# Altium PCB ble_lock_V1.2-20201223.PcbDoc
Units mm, origin at the board's own origin, x right, y up, seen from the top; angles counter-clockwise.
Board outline 45 x 20 mm, 2 copper layers (Top Layer, Bottom Layer); 60 components, 46 nets, 179 pads, 123 vias.
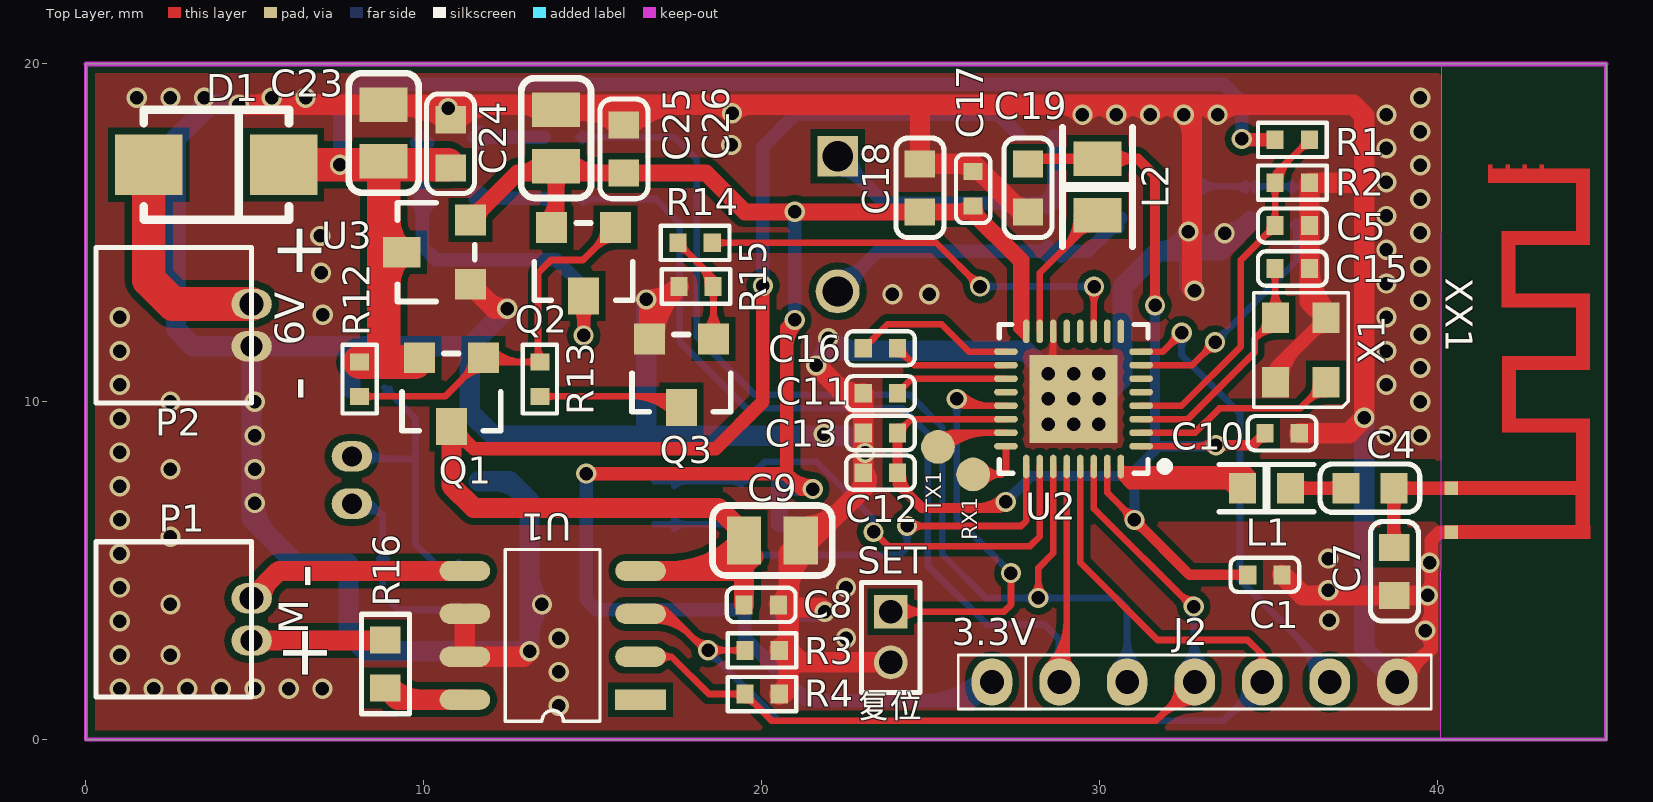
[diagram p0: Top Layer view]
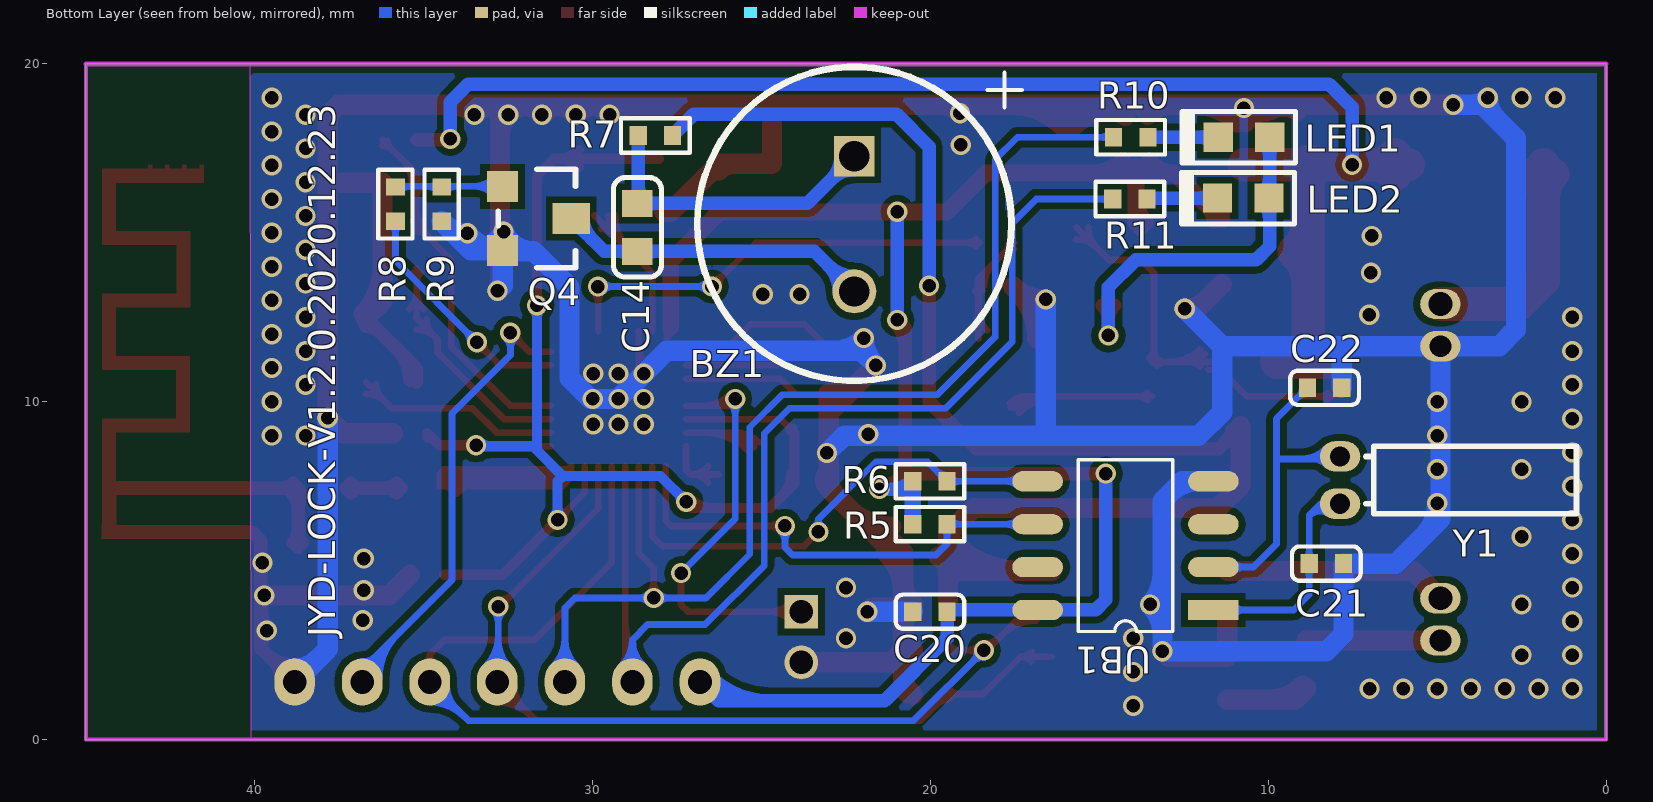
[diagram p1: Bottom Layer view, seen from below]
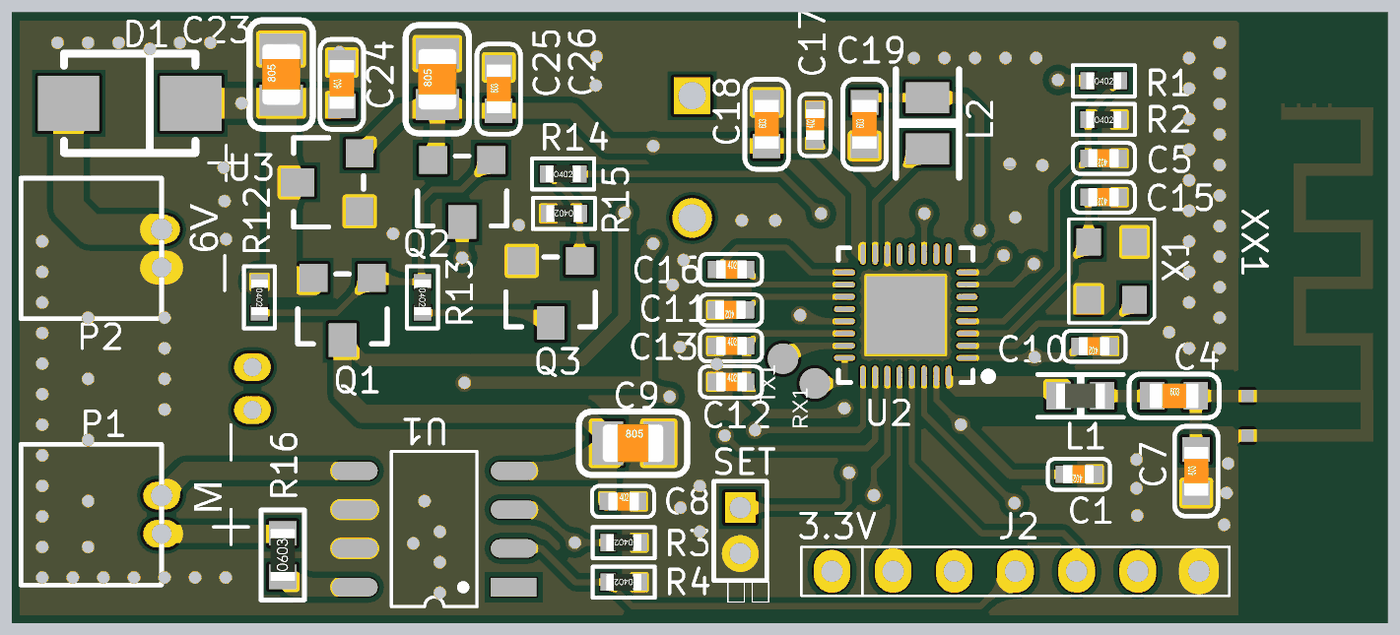
[diagram p2: 3D render of the assembled board from above, using the file's embedded part models]
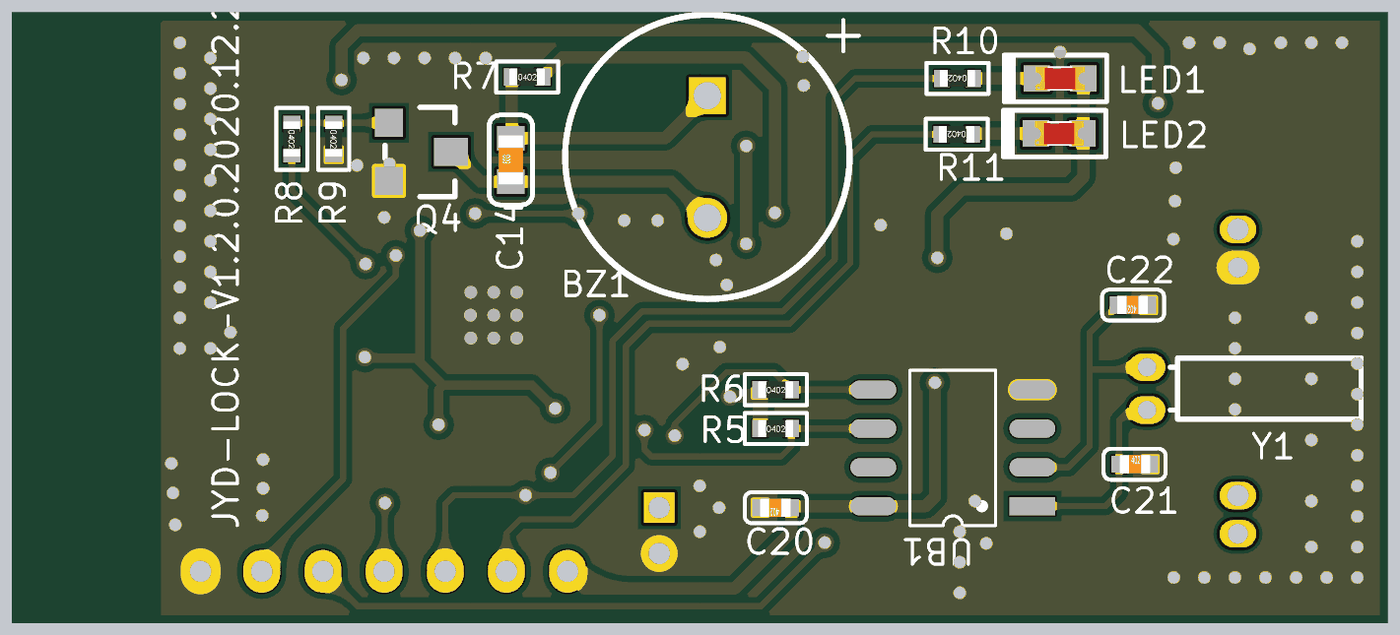
[diagram p3: 3D render of the assembled board from below, using the file's embedded part models]

## Layer stack, top to bottom
Top Layer: signal copper 0.0356
Dielectric: dielectric 0.32, FR-4, Dk 4.8
Bottom Layer: signal copper 0.0356

## Board outline
0,0 0,20 45,20 45,0

## Design rules (kind name [scope] priority, off if disabled: settings)
Clearance [All] p1 off: gap=0.5
Clearance Clearance_1 [All] p2: gap=0.2
ComponentClearance [All] p1: gap=0 collisioncheckmode=3 verticalgap=0 showdistances=FALSE
HoleToHoleClearance [All] p1: gap=0 allowstackedmicrovias=TRUE
MinimumSolderMaskSliver [All] p1: minsoldermaskwidth=0
PolygonConnect PolygonConnect_1 [IsVia] p1: connectstyle=Direct reliefconductorwidth=0.254 reliefentries=4 polygonreliefangle="90 Angle" airgapwidth=0.254
PolygonConnect [All] p2: connectstyle=Direct reliefconductorwidth=0.254 reliefentries=4 polygonreliefangle="90 Angle" airgapwidth=0.254
RoutingVias [All] p1: holewidth=0.4 width=0.6 viastyle="Through Hole" minholewidth=0.3 minwidth=0.5 maxholewidth=0.4 maxwidth=0.6
ShortCircuit [All] p1: allowed=TRUE
SilkToSilkClearance [All] p1: silktosilkclearance=0
SilkToSolderMaskClearance SilkscreenOverComponentPads [IsPad] p1: minsilkscreentomaskgap=0 clearancetoexposedcopper=TRUE
SolderMaskExpansion [All] p1: expansion=0.102
Width [All] p1: maxlimit=2.032 minlimit=0.152 preferedwidth=0.254
22 further rules are at their usual default settings.

## Components (designator, comment, footprint, x,y, rotation, side; value= is the part's Value field where it differs from the comment)
BZ1 "BUZZER" BUZZER_D93_L40 22.25,15.265 r270 bottom
C1 "1uF/6.3V" 0402C 34.9,4.877 r0 top
C4 "1.5pF" 0603C 38.01,7.442 r0 top
C5 "1nF" 0402C 35.712,15.215 r0 top
C7 "1pF" 0603C 38.735,4.978 r90 top
C8 "0.1uF" 0402C 19.99,3.988 r180 top
C9 "22uF" 0805C 20.32,5.893 r0 top
C10 "0.1uF" 0402C 35.408,9.068 r0 top
C11 "0.1uF" 0402C 23.52,10.253 r0 top
C12 "1uF" 0402C 23.52,7.899 r180 top
C13 "0.1uF" 0402C 23.52,9.076 r180 top
C14 "10uF/10V" 0603C 28.677,15.164 r90 bottom
C15 "2.7pF" 0402C 35.712,13.945 r0 top
C16 "0.1uF" 0402C 23.52,11.582 r180 top
C17 "0.1uF" 0402C 26.264,16.307 r270 top
C18 "10uF/6.3V" 0603C 24.689,16.332 r90 top
C19 "10uF/6.3V" 0603C 27.889,16.332 r90 top
C20 "0.1uF" 0402C 20.015,3.785 r180 bottom
C21 "22pF" 0402C 8.28,5.207 r0 bottom
C22 "22pF" 0402C 8.331,10.414 r180 bottom
C23 "10uF/16V" 0805C 8.814,17.958 r90 top
C24 "100nF" 0603C 10.795,17.637 r90 top
C25 "10uF/10V" LC-0805_C 13.919,17.805 r90 top
C26 "100nF" 0603C 15.926,17.485 r90 top
D1 "SS14" DO-214AA 3.861,17.018 r180 top
J2 "7P" 7P-2.0MM 26.822,1.702 r0 top
L1 "2nH" 0603L 34.95,7.442 r180 top
L2 "4.7uH" 0805L 29.947,16.358 r270 top
LED1 "red" 0603LED 10.719,17.831 r0 bottom
LED2 "green" 0603LED 10.744,16.027 r0 bottom
P1 "电机接口" 2P-1.25mm-弯脚 4.902,3.556 r90 top
P2 "电源接口" 2P-1.25mm-弯脚 4.902,12.268 r90 top
Q1 "SI2301" "SOT-23 - GDS" 10.82,10.287 r180 top
Q2 "SI2301" "SOT-23 - GDS" 14.732,14.148 r180 top
Q3 "PMBT3904" "SOT-23 - BCE" 17.628,10.846 r180 top
Q4 "SS8050" SOT-23-3L 31.648,15.428 r270 bottom
R1 "510K%1" 0402R 35.712,17.755 r180 top
R2 "100K%1" 0402R 35.712,16.485 r180 top
R3 "10K" 0402R 20.015,2.642 r0 top
R4 "10K" 0402R 20.015,1.346 r0 top
R5 "10K" 0402R 20.015,6.375 r0 bottom
R6 "10K" 0402R 20.015,7.645 r0 bottom
R7 "10R" 0402R 28.143,17.882 r0 bottom
R8 "200R" 0402R 35.839,15.85 r90 bottom
R9 "10K" 0402R 34.468,15.85 r90 bottom
R10 "560R" 0402R 14.072,17.831 r180 bottom
R11 "560R" 0402R 14.097,16.002 r180 bottom
R12 "100K" 0402R 8.103,10.668 r90 top
R13 "1K" 0402R 13.437,10.668 r90 top
R14 "4.7K" 0402R 18.034,14.707 r180 top
R15 "10K" 0402R 18.059,13.411 r0 top
R16 "2R2" 0603R 8.865,2.235 r90 top
SET "SW-PB" SET 23.825,3.785 r270 top
U1 "CP2117" SOP8#1 13.817,3.087 r180 top
U2 "BK3431Q" QFN32_4*4*0.4 29.235,10.084 r180 top
U3 "HT7533-1" SOT-23-3L 10.363,14.427 r90 top
UB1 "PCF8563" SOP8#2 14.224,5.74 r0 bottom
X1 "16MHZ" XTAL3225 35.966,11.532 r90 top
XX1 "TIANX" BT_NAMI_NO 40.412,7.442 r270 top
Y1 "32.768KHZ" 晶振 7.874,8.382 r270 bottom

## Footprints (in the part's own frame and the unit in brackets; to place one, negate y for a bottom-side part, rotate by r counter-clockwise, add the part's x,y. Pads: shape width x height; smd on the part's side, far side on the other; paste and mask are expansions set on the pad)
2P-1.25mm-弯脚 [mm]
  oval 0.9x1.2 hole 0.65: 1(-0.625,0)
  oval 0.9x1.2 hole 0.7: 2(0.625,0)
  silkscreen extent -2.3,0 2.3,4.6
7P-2.0MM [mm]
  oval 1.2x1.4 hole 0.7 mask+0.05: 1(0,0) 2(2,0) 3(4,0) 4(6,0) 5(8,0) 6(10,0) 7(12,0)
  silkscreen extent -1,-0.8 13,0.8
0402C [mil]
  rect 20x22 smd mask+2: 1(20,0) 2(-20,0)
  silkscreen extent -40,-20 40,20, body extent -20,-12 19,12, height 8
0402R [mil]
  rect 20x22 smd mask+2: 1(20,0) 2(-20,0)
  silkscreen extent -40,-20 40,20, body extent -23,-11 23,11, height 16
0603C [mm]
  rect 0.8x0.9 smd: 1(-0.711,0) 2(0.711,0)
  silkscreen extent -1.47,-0.71 1.47,0.71, body extent -0.8,-0.4 0.8,0.4, height 0.3
0603L [mm]
  rect 0.8x0.9 smd: 1(-0.711,0) 2(0.711,0)
  silkscreen extent -1.4,-0.7 1.4,0.7, body extent -0.82,-0.41 0.82,0.41, height 0.46
0603LED [mil]
  rect 34x34 smd: 1(-30,0) 2(30,0)
  silkscreen extent -60,-30 72,30, body extent -31,-16 31,16, height 24
0603R [mm]
  rect 0.8x0.9 smd: 1(-0.711,0) 2(0.711,0)
  silkscreen extent -1.47,-0.71 1.47,0.71, body extent -0.85,-0.4 0.85,0.4, height 0.56
0805C [mil]
  rect 40x56 smd: 1(-33,0) 2(33,0)
  silkscreen extent -70,-41 70,41, body extent -39,-25 39,25, height 30
0805L [mil]
  rect 40x56 smd: 1(-33,0) 2(33,0)
  silkscreen extent -70,-41 70,41
BT_NAMI_NO [mm]
  rect 0.4x0.4 smd: 1(0,0) 2(1.3,0)
  Top Layer region: -9.578,1.22 -9.136,1.22 -9.136,1.107 -9.578,1.107
  Top Layer region: -9.571,2.745 -9.135,2.745 -9.135,2.632 -9.571,2.632
  Top Layer region: -9.573,2.239 -9.136,2.239 -9.136,2.126 -9.573,2.126
  Top Layer region: -9.574,1.732 -9.135,1.732 -9.135,1.619 -9.574,1.619
  Top Layer region: -9.048,1.106 -9.45,1.106 -9.45,4.108 -9.048,4.108
  Top Layer region: -9.45,3.704 -9.45,4.106 -7.201,4.106 -7.201,3.704
  Top Layer region: -7.202,1.51 -7.604,1.51 -7.604,4.106 -7.202,4.106
  Top Layer region: -5.35,1.51 -5.752,1.51 -5.752,4.103 -5.35,4.103
  Top Layer region: -7.609,1.506 -7.609,1.907 -5.359,1.907 -5.359,1.506
  Top Layer region: -5.751,3.704 -5.751,4.106 -3.502,4.106 -3.502,3.704
  Top Layer region: -3.5,1.512 -3.902,1.512 -3.902,4.101 -3.5,4.101
  Top Layer region: -3.899,1.51 -3.899,1.911 -1.65,1.911 -1.65,1.51
  Top Layer region: -0.208,3.695 -0.208,4.11 1.495,4.11 1.495,3.695
  Top Layer region: -1.651,1.512 -2.053,1.512 -2.053,4.101 -1.651,4.101
  Top Layer region: -2.05,3.703 -2.05,4.104 0.199,4.104 0.199,3.703
  Top Layer region: 0.2,-0.197 -0.203,-0.197 -0.203,4.1 0.2,4.1
  Top Layer region: 1.5,-0.18 1.098,-0.18 1.098,4.116 1.5,4.116
BUZZER_D93_L40 [mm]
  rect 1.2x1.2 hole 0.9: 1(-2,0)
  round 1.3 hole 0.9: 2(2,0)
  silkscreen extent -4.65,-4.65 4.65,4.65
DO-214AA [mm]
  rect 2x1.8 smd: 1(2,0) 2(-2,0)
  silkscreen extent -2.15,-1.63 2.15,1.63
LC-0805_C [mil]
  rect 40x56 smd: 1(-33,0) 2(33,0)
  silkscreen extent -70,-41 70,41, body extent -39,-25 39,25, height 30
QFN32_4*4*0.4 [mm]
  rect 2.6x2.6 smd paste-0.025 mask+0.051: 0(0,0)
  oval 0.7x0.2 smd paste-0.025 mask+0.051: 1(-2,1.4) 2(-2,1) 3(-2,0.6) 4(-2,0.2) 5(-2,-0.2) 6(-2,-0.6) 7(-2,-1) 8(-2,-1.4) 17(2,-1.4) 18(2,-1) 19(2,-0.6) 20(2,-0.2) 21(2,0.2) 22(2,0.6) 23(2,1) 24(2,1.4)
  oval 0.2x0.7 smd paste-0.025 mask+0.051: 9(-1.4,-2) 10(-1,-2) 11(-0.6,-2) 12(-0.2,-2) 13(0.2,-2) 14(0.6,-2) 15(1,-2) 16(1.4,-2) 25(1.4,2) 26(1,2) 27(0.6,2) 28(0.2,2) 29(-0.2,2) 30(-0.6,2) 31(-1,2) 32(-1.4,2)
  silkscreen extent -2.82,-2.2 2.2,2.2
SET [mm]
  rect 1x1 hole 0.7: 1(0,0)
  round 1 hole 0.7: 2(1.5,0)
  silkscreen extent -0.86,-0.86 2.39,0.86
SOP8#1 [mm]
  rect 1.5x0.6 smd mask+0.05: 1(-2.6,1.905)
  oval 1.5x0.6 smd mask+0.05: 2(-2.6,0.635) 3(-2.6,-0.635) 4(-2.6,-1.905) 5(2.6,-1.905) 6(2.6,-0.635) 7(2.6,0.635) 8(2.6,1.905)
  round 0.4 on Top Overlay mask+0.05: ""(-0.949,1.905)
  silkscreen extent -1.4,-2.54 1.4,2.54
SOP8#2 [mm]
  rect 1.5x0.6 smd mask+0.05: 1(-2.6,1.905)
  oval 1.5x0.6 smd mask+0.05: 2(-2.6,0.635) 3(-2.6,-0.635) 4(-2.6,-1.905) 5(2.6,-1.905) 6(2.6,-0.635) 7(2.6,0.635) 8(2.6,1.905)
  round 0.4 on Bottom Overlay mask+0.05: ""(-0.949,1.905)
  silkscreen extent -1.4,-2.54 1.4,2.54
"SOT-23 - BCE" [mil]
  rect 36x36 smd: B(-37.4,-40) E(37.4,-40)
  rect 36x43.31 smd: C(0,40)
  silkscreen extent -57,-45 58,45
"SOT-23 - GDS" [mil]
  rect 36x43.31 smd: D(0,40)
  rect 36x36 smd: G(-37.4,-40) S(37.4,-40)
  silkscreen extent -57,-45 58,45
SOT-23-3L [mil]
  rect 36x36 smd: 1(-37.4,-40) 2(37.4,-40)
  rect 36x43.31 smd: 3(0,40)
  silkscreen extent -57,-45 58,45
XTAL3225 [mm]
  rect 0.9x0.8 smd: 1(-0.95,-0.75) 2(0.95,-0.75) 3(0.95,0.75) 4(-0.95,0.75)
  silkscreen extent -1.7,-1.4 1.7,1.4
晶振 [mm]
  oval 0.9x1.2 hole 0.6: 1(0,0) 2(1.4,0)
  silkscreen extent -0.3,0.76 1.7,7

## Part data
BZ1: "Buzzer"
C1 C4 C7 C10 C11 C12 C13 C15 C16 C17 C18 C19: library part Cap, "Capacitor"
C5 C8 C9 C26: library part CAP-NP, "Capacitor, Ceramic"
C14: library part C_0_Dup1
C20 C21 C22: library part C
C23 C25: library part CAP-P, "Capacitor, tolerance ±20%"
C24: library part "CAP NP"
D1: library part D
L1 L2: "Power Inductor, 4.7uH, 0.7A, 260mR DCR"
LED1 LED2: library part LED
P1 P2: library part "Header 2", "Header, 2-Pin"
Q1 Q2: library part PWRMOSFET_EP_DGS_0
Q4: library part NPN_BJT, "Bipolar Junction Transistor"
R1 R2: library part Res2, "Resistor"
R3 R4: library part Pro71C3.TMP_UnNamed_1
R5 R6 R10 R11 R12 R13 R14 R15: library part R
R7 R8 R9 R16: library part R_Dup1
SET: "Switch"
U1: library part AM24LC02_0
U3: library part XC6206P302M
UB1: library part IC8
Y1: library part 晶振

## Free pads (board coordinates)
  round 1 smd: 1(25.222,8.661) 2(26.264,7.849)

## Via types
v1: diameter 0.6, hole 0.4, Top Layer to Bottom Layer, tented both sides, 123 vias

## Nets (pads, with @x,y where several pads share a name; then routed paths per layer and width w, separated by ;. In a path a pad name is that pad's centre, name@x,y a point inside that pad or via, vN(x,y) a via of type N, cw(c..) or ccw(c..) an arc to the next point about the centre after c; other vN are vias at no path point)
BAT_ADC: C5.2 R1.2 R2.1 U2.4 | length 14
  Top Layer w0.2: U2.4 32.439,9.884 34.188,11.633 34.188,14.199 C5.2 R2.1 35.204,16.739 R1.2 ; 34.898,14.908 cw(c35.204,14.602) C5.2@35.204,15.035 ; C5.2@34.959,14.97 ccw(c34.74,15.189) C5.2@35.05,15.189 ; C5.2@35.096,15.349 ccw(c34.833,15.612) 35.204,15.612 ccw(c35.576,15.612) C5.2@35.313,15.349 ; R2.1@35.096,16.35 cw(c34.833,16.087) 35.204,16.087 cw(c35.576,16.087) R2.1@35.313,16.35 ; R2.1@35.158,16.51 cw(c35.599,16.51) 35.288,16.822 ; R2.1@35.358,16.51 cw(c36.282,16.51) 35.629,17.163 ; 35.914,17.448 cw(c36.22,17.142) R1.2@36.22,17.575 ; R1.2@35.975,17.51 ccw(c35.756,17.729) R1.2@36.066,17.729
BEEP: R8.2 U2.7 | length 9.2
  Top Layer w0.2: U2.7 32.75,11.084 v1(33.426,11.76) ; v1@33.226,11.76 cw(c32.744,11.76) 33.085,11.419 cw(c33.426,11.077) v1@33.426,11.56
  Bottom Layer w0.2: v1(33.426,11.76) 35.839,14.173 R8.2 ; v1@33.426,11.96 ccw(c33.426,12.443) 33.768,12.102 ccw(c34.109,11.76) v1@33.626,11.76 ; R8.2@35.731,15.233 cw(c35.468,14.97) 35.839,14.97 cw(c36.211,14.97) R8.2@35.948,15.233
GND: C1.1 C5.1 C7.1 C8.2 C9.2 C10.1 C11.2 C12.1 C13.1 C15.1 C17.2 C18.2 C19.1 C20.2 C21.2 C22.1 C23.2 C24.2 C25.2 C26.2 J2.7 P2.1 Q3.E Q4.2 R2.2 R3.1 R4.1 R9.2 R15.2 SET.2 U1.6 U1.7 U2.0 U2.14 U3.1 UB1.4 X1.2 X1.4 XX1.2 | length 251.9
  Top Layer w0.2: U2.0@28.344,10.975 ccw(c27.64,11.679) 28.635,11.679 ; v1(28.485,10.834) ccw(c28.123,11.196) U2.0@28.635,11.196 ; U2.0@28.635,10.684 U2.14
  Top Layer w0.4: X1.4 35.216,10.982 X1.2 ; X1.4@35.416,10.632 cw(c36.744,10.632) 35.805,11.571 ; 36.29,12.055 cw(c36.716,11.628) X1.2@36.716,12.232 ; J2.7 39.827,2.707 39.827,5.893 40.076,6.142 XX1.2 ; J2.7@38.822,2.202 ccw(c38.822,3.409) 39.676,2.555 ; J2.7@39.222,1.802 cw(c39.947,1.802) 39.435,2.314 ; v1@39.579,3.297 ccw(c38.979,3.896) 39.827,3.896 ; v1@39.59,3.145 cw(c39.246,2.677) 39.827,2.677 ; v1@39.655,4.196 cw(c39.239,3.78) 39.827,3.78 ; v1@39.655,4.338 ccw(c39.239,4.754) 39.827,4.754 ; v1@39.706,5.162 cw(c39.412,4.868) 39.827,4.868 ; v1@39.706,5.303 ccw(c39.412,5.596) 39.827,5.596
  Top Layer w0.6: v1(4.521,18.796) C23.2 15.326,18.796 ; 5.007,18.796 ccw(c5.007,19.493) v1(5.5,19) ccw(c5.993,19.493) 5.993,18.796 ; 6.007,18.796 ccw(c6.007,19.493) v1(6.5,19) ccw(c6.993,19.493) 6.993,18.796 ; C23.2@9.121,18.616 cw(c9.551,17.87) 9.774,18.702 ; C23.2@9.423,18.796 cw(c9.423,17.026) C24.2@10.674,18.278 ; 9.904,18.636 ccw(c10.241,19.649) v1(10.719,18.694) ; C24.2@10.491,18.702 cw(c10.719,18.475) v1@10.719,18.796 ; v1@10.871,18.796 cw(c10.871,18.475) C24.2@11.099,18.702 ; C24.2@10.916,18.278 cw(c12.167,17.026) 12.167,18.796 ; U1.6 U1.7 12.968,2.452 v1(13.132,2.616) cw(c12.735,3.013) 12.735,2.452 ; U3.1 12.106,12.751 v1(12.471,12.751) cw(c12.471,13.634) 11.847,13.009 ; 12.846,18.796 cw(c12.846,17.774) C25.2@13.569,18.497 ; C25.2@14.186,18.796 cw(c14.186,16.506) C26.2@15.805,18.125 ; C25.2@14.226,18.463 cw(c14.757,17.545) 15.031,18.569 ; C25.2@14.269,18.497 cw(c14.992,17.774) 14.992,18.796 ; C26.2@15.622,18.55 cw(c16.217,17.955) 16.217,18.796 ; C26.2 15.326,18.796 ; C26.2@16.047,18.125 cw(c17.666,16.506) 17.666,18.796 ; Q3.E 16.678,12.537 ; Q3.E@16.835,11.862 cw(c18.845,11.862) R15.2@17.424,13.283 ; 18.513,18.796 cw(c18.513,17.929) v1(19.126,18.542) cw(c19.739,17.929) 19.739,18.796 ; R4.1 20.803,1.626 ; R3.1@20.523,2.662 cw(c20.523,2.037) 20.965,2.479 ; R4.1@20.527,1.326 ccw(c20.502,1.626) 20.803,1.626 ; R3.1@20.531,2.687 cw(c20.473,2.362) 20.803,2.362 ; C8.2@20.53,3.981 ccw(c19.873,4.638) 20.803,4.638 ; C8.2@20.53,3.995 cw(c19.873,3.338) 20.803,3.338 ; R3.1@20.532,2.712 cw(c20.471,2.386) 20.803,2.386 ; R4.1@20.556,1.339 ccw(c19.96,1.935) 20.803,1.935 ; R3.1@20.556,2.634 ccw(c19.96,3.23) 20.803,3.23 ; R3.1@20.556,2.649 cw(c19.96,2.053) 20.803,2.053 ; 20.803,4.329 cw(c22.519,4.329) C9.2@21.305,5.543 ; C9.2@21.158,6.304 ccw(c21.158,8.033) 22.38,6.81 ; 21.563,3.912 cw(c21.563,3.478) v1(21.869,3.785) 21.742,3.912 20.803,3.912 ; v1(21.615,11.074) 23.012,9.677 ; 22.065,10.625 ccw(c23.012,11.573) C11.2@23.012,10.233 ; 22.786,7.215 ccw(c22.127,7.874) C12.1@23.058,7.874 ; C11.2@22.976,10.256 ccw(c23.322,9.987) 23.012,9.677 ; C13.1 23.012,9.677 ; C11.2 23.012,7.442 ; C12.1@23.05,7.901 cw(c22.761,7.694) 23.012,7.442 ; SET.2 21.16,2.285 20.803,2.642 ; 25.797,17.043 cw(c25.797,16.374) C17.2@26.271,16.847 ; C17.2@26.289,16.861 cw(c26.289,16.491) 26.55,16.753 ; 27.4,15.903 ccw(c27.839,16.342) C19.1@27.839,15.721 ; C19.1 27.682,15.621 26.26,17.043 C18.2 24.689,18.796 ; 28.785,18.796 cw(c28.785,17.785) v1(29.5,18.5) cw(c30.215,17.785) 30.215,18.796 ; 29.785,18.796 cw(c29.785,17.785) v1(30.5,18.5) cw(c31.215,17.785) 31.215,18.796 ; 30.785,18.796 cw(c30.785,17.785) v1(31.5,18.5) cw(c32.215,17.785) 32.215,18.796 ; 31.785,18.796 cw(c31.785,17.785) v1(32.5,18.5) ; 32.741,17.919 ccw(c31.919,17.919) v1(32.5,18.5) ; 32.785,18.796 cw(c32.785,17.785) v1(33.5,18.5) cw(c34.215,17.785) 34.215,18.796 ; v1(32.817,13.284) 32.741,13.36 32.741,18.796 ; 33.215,18.796 ccw(c33.215,17.785) v1(32.5,18.5) ; C1.1 36.017,4.267 C7.1 v1(39.726,4.267) ; C10.1 37.389,9.068 v1(37.846,9.525) 37.846,18.466 37.516,18.796 32.741,18.796 ; C15.1@36.22,13.97 ccw(c38.155,13.97) X1.2@36.787,12.602 ; 36.411,4.267 ccw(c36.411,4.788) v1(36.779,4.42) ccw(c37.147,4.788) 37.147,4.267 ; X1.2 36.22,12.978 R2.2 37.821,16.485 ; 15.326,18.796 24.689,18.796 ; 16.678,12.537 16.678,12.939 v1(16.586,13.03) ccw(c16.63,14.333) R15.2 16.678,12.537 ; 20.803,1.626 20.803,2.642 ; 20.803,2.642 20.803,3.912 ; 20.803,3.912 20.803,5.537 C9.2 21.463,5.893 23.012,7.442 ; 24.689,18.796 32.741,18.796 ; C8.2@20.506,4.008 cw(c20.443,3.653) 20.803,3.653 ccw(c20.443,3.653) C8.2@20.506,4.008
  Bottom Layer w0.6: 3.244,18.383 ccw(c2.627,19) v1(3.5,19) ccw(c3.993,19.493) 3.993,18.796 ; v1(4.521,18.796) 3.658,18.796 2.667,17.805 2.667,12.141 3.165,11.643 P2.1 ; v1(5,7) ccw(c6.376,7) 5.403,6.027 ; C22.1 7.823,11.643 ; UB1.4 12.548,7.645 13.132,7.061 v1(13.132,2.616) 8.28,2.616 7.772,3.124 C21.2 6.223,5.207 4.902,6.528 P2.1 ; UB1.4@12.074,7.645 cw(c12.074,6.502) 12.882,7.311 ; v1(12.471,12.751) 11.364,11.643 ; 13.132,3.111 cw(c14.389,3.111) v1(13.5,4) cw(c14.389,4.889) 13.132,4.889 ; v1(16.586,13.03) 16.586,8.992 ; C20.2 v1(21.869,3.785) ; v1(21.615,11.074) 22.047,11.506 27.813,11.506 v1(28.485,10.834) v1(29.235,10.084) 30.074,10.084 30.683,10.693 30.683,13.386 31.75,14.453 ; v1@21.648,11.107 ccw(c20.867,11.887) v1(21.971,11.887) ccw(c22.891,12.807) 22.891,11.506 ; v1(23.063,8.484) 22.555,8.992 21.844,8.992 16.586,8.992 ; 32.664,13.652 ccw(c33.185,13.652) v1(32.817,13.284) 32.664,13.437 Q4.2@32.664,14.453 ; R9.2@34.4,15.273 cw(c33.706,15.967) v1(33.706,14.986) ; R9.2 33.604,14.478 ; v1(37.846,9.525) 37.846,2.678 J2.7 ; 38.14,2.385 ccw(c38.822,3.067) J2.7@38.822,2.102 ; P2.1 7.823,11.643 ; 7.823,11.643 11.364,11.643 ; 11.364,11.643 11.364,9.693 12.065,8.992 16.586,8.992 ; 31.75,14.453 ccw(c31.75,15.421) v1(32.639,15.037) ccw(c33.604,15.591) 33.604,14.478 ; 31.75,14.453 Q4.2@32.664,14.453 ; Q4.2@32.664,14.453 Q4.2 ; Q4.2 ccw(c32.664,15.799) v1(33.706,14.986) ; Q4.2 33.604,14.478 ; 33.604,14.478 ccw(c33.274,14.808) v1(33.706,14.986)
  other v1: 14,1 1,1.5 2,1.5 3,1.5 4,1.5 5,1.5 6,1.5 7,1.5 14,2 1,2.5 2.5,2.5 14,3 22.5,3 39.649,3.226 1,3.5 36.805,3.531 2.5,4 1,4.5 22.5,4.5 39.776,5.232 36.779,5.359 1,5.5 2.5,6 1,6.5 1,7.5 2.5,8 5,8 1,8.5 5,9 38.5,9 39.5,9 21.844,9.042 28.485,9.334 29.235,9.334 29.985,9.334 1,9.5 2.5,10 5,10 39.5,10 28.485,10.084 29.997,10.084 1,10.5 38.5,10.5 29.235,10.834 29.985,10.834 39.5,11 1,11.5 38.5,11.5 39.5,12 1,12.5 38.5,12.5 7.01,12.573 39.5,13 23.876,13.183 24.968,13.183 38.5,13.5 6.96,13.818 39.5,14 38.5,14.5 6.934,14.91 39.5,15 38.5,15.5 39.5,16 38.5,16.5 39.5,17 38.5,17.5 19.101,17.602 39.5,18 38.5,18.5 1.5,19 2.5,19 39.5,19
INT_FP: U2.5
IRQ_TSM12: U2.6
M3V3: C17.1 C18.1 C20.1 C25.1 C26.1 J2.1 Q2.S R5.1 R6.1 U2.16 U3.2 UB1.8 | length 67.6
  Top Layer w0.2: 27.734,14.329 27.835,14.227 U2.16
  Top Layer w0.4: v1(14.808,7.874) 20.726,7.874 20.752,7.899 ; 20.752,11.627 cw(c21.774,11.627) v1@21.051,12.35 ; 20.779,7.821 ccw(c21.514,8.555) v1@21.514,7.517 ; v1(20.98,12.421) 20.752,12.192 20.752,7.849 21.184,7.417 v1(21.514,7.417)
  Top Layer w0.5: U3.2 12.776,16.774 ; U3.2@11.379,15.584 ccw(c11.379,16.085) 11.733,15.731 ccw(c12.087,15.377) U3.2@11.586,15.377 ; C25.1@13.515,17.128 cw(c12.776,17.72) 12.776,16.774 ; Q2.S@13.635,15.31 ccw(c12.951,15.995) 13.919,15.995 ; C25.1@13.737,16.785 cw(c13.296,16.344) 13.919,16.344 cw(c14.542,16.344) C25.1@14.102,16.785 ; Q2.S 13.919,15.301 C25.1@13.919,16.774 ; C25.1 C25.1@13.919,16.774 ; C25.1@14.305,17.15 ccw(c15.213,18.057) 15.213,16.774 ; 25.799,15.621 ccw(c25.799,16.238) C17.1@26.235,15.802 ; C17.1@26.293,15.799 ccw(c26.855,15.799) 26.457,15.402 ; 27.632,14.227 26.238,15.621 C18.1 v1(20.98,15.621) 19.507,15.621 18.355,16.774 C26.1 C25.1@13.919,16.774 ; 12.776,16.774 C25.1@13.919,16.774
  Bottom Layer w0.4: v1(14.808,7.874) 14.808,4.14 15.113,3.835 UB1.8 19.456,3.835 C20.1 19.507,2.997 21.361,1.143 26.264,1.143 J2.1 ; R6.1 20.752,7.417 v1(21.514,7.417) ; R6.1@20.561,7.658 ccw(c21.144,8.241) 21.144,7.417 ; v1(20.98,12.421) v1(20.98,15.621) ; 24.749,1.143 ccw(c24.749,3.675) J2.1@26.54,1.885 ; 25.715,1.143 ccw(c25.715,2.709) J2.1@26.822,1.602
  Bottom Layer w0.5: R5.1 R6.1
MOTO+: P1.1 R16.2 | length 4
  Top Layer w0.6: P1.1 8.849,2.931 R16.2
MOTO-: P1.2 U1.5 | length 7.2
  Top Layer w0.6: P1.2 5.713,4.992 U1.5 ; P1.2@5.202,4.181 cw(c5.926,4.181) 5.414,4.693
NetBZ1_1: BZ1.1 C14.2 R7.1 | length 12.1
  Bottom Layer w0.4: BZ1.1@22.25,16.865 cw(c22.25,15.9) 22.933,16.583 cw(c23.616,17.265) BZ1.1@22.65,17.265 ; BZ1.1 23.641,15.875 C14.2 28.651,15.9 R7.1 ; C14.2@28.485,15.734 ccw(c28.144,15.392) 28.144,15.875 ccw(c28.144,16.358) 28.485,16.016 ccw(c28.084,16.417) 28.651,16.417 ; 28.651,16.298 ccw(c29.05,16.298) C14.2@28.768,16.016
NetBZ1_2: BZ1.2 C14.1 Q4.3 | length 13.5
  Bottom Layer w0.4: BZ1.2 23.438,14.453 C14.1 29.657,14.453 Q4.3 ; BZ1.2@22.25,13.715 ccw(c22.25,14.802) 23.019,14.034 ccw(c23.787,13.265) BZ1.2@22.7,13.265 ; C14.1@28.485,14.311 ccw(c28.144,13.97) 28.144,14.453 ccw(c28.144,14.935) C14.1@28.485,14.594 ; C14.1@28.868,14.311 cw(c29.209,13.97) 29.209,14.453 cw(c29.209,14.935) C14.1@28.868,14.594 ; 30.035,14.831 ccw(c29.437,15.428) Q4.3@30.282,15.428 ; Q4.3@30.259,15.055 cw(c30.54,14.774) Q4.3@30.54,15.171
NetC4_1: C4.1 L1.1 | length 3.2
  Top Layer w0.4: L1.1 C4.1 ; L1.1@35.803,7.301 cw(c36.144,6.959) 36.144,7.442 cw(c36.144,7.925) L1.1@35.803,7.584 ; 36.816,7.442 cw(c36.816,6.959) C4.1@37.158,7.301 ; 36.817,7.442 ccw(c36.817,7.924) C4.1@37.158,7.583
NetC4_2: C4.2 C7.2 XX1.1 | length 5.7
  Top Layer w0.4: C4.2@38.58,7.251 cw(c38.239,6.909) 38.721,6.909 cw(c39.204,6.909) C4.2@38.863,7.251 ; C7.2@38.594,5.831 ccw(c38.285,6.14) 38.721,6.14 ; 38.721,6.205 ccw(c39.251,6.205) C7.2@38.876,5.831 ; C7.2 38.721,5.703 C4.2 XX1.1 ; C4.2@38.863,7.301 cw(c39.204,6.959) 39.204,7.442 cw(c39.204,7.925) C4.2@38.863,7.583
NetC11_1: C11.1 U2.19 | length 3.4
  Top Layer w0.2: C11.1 24.459,10.684 U2.19
NetC15_2: C15.2 U2.3 X1.3 | length 9.8
  Top Layer w0.2: U2.3 32.623,9.484 34.595,11.455 34.595,11.86 X1.3@35.204,12.47 ; 34.619,11.884 cw(c35.216,11.287) X1.3@35.216,12.132 ; 34.74,12.005 ccw(c34.313,12.432) X1.3@34.916,12.432 ; X1.3@35.004,12.744 ccw(c34.521,13.227) 35.204,13.227 ; C15.2@35.096,13.81 cw(c34.833,13.547) 35.204,13.547 cw(c35.576,13.547) C15.2@35.313,13.81 ; 35.204,13.285 ccw(c35.97,13.285) X1.3@35.429,12.744 ; C15.2 X1.3@35.204,12.47 ; X1.3 X1.3@35.204,12.47
NetC16_1: C16.1 U2.17 | length 4.9
  Top Layer w0.2: C16.1 23.724,12.294 25.324,12.294 25.527,12.09 26.134,11.484 26.543,11.484 U2.17
NetC16_2: C16.2 U2.18 | length 4.8
  Top Layer w0.2: C16.2@24.028,11.403 cw(c24.028,10.97) 24.335,11.276 ; C16.2 24.181,11.43 24.527,11.084 U2.18@27.051,11.084 ; C16.2@24.182,11.557 ccw(c24.493,11.557) C16.2@24.273,11.337 ; 26.229,11.084 U2.18@27.051,11.084 ; U2.18 U2.18@27.051,11.084
NetC21_1: C21.1 UB1.1 Y1.2 | length 9.5
  Bottom Layer w0.2: Y1.2 8.436,6.982 8.788,6.629 ; Y1.2@8.106,6.856 cw(c8.328,6.517) 8.614,6.804 ; Y1.2@8.215,6.689 cw(c8.465,6.306) 8.788,6.629 ; C21.1@8.68,5.073 cw(c8.417,4.81) 8.788,4.81 cw(c9.16,4.81) C21.1@8.897,5.073 ; C21.1@8.68,5.341 ccw(c8.417,5.604) 8.788,5.604 ccw(c9.16,5.604) C21.1@8.897,5.341 ; UB1.1@11.033,3.694 ccw(c10.691,3.353) 10.691,3.835 ccw(c10.691,4.318) UB1.1@11.033,3.977 ; UB1.1 9.246,3.835 8.788,4.293 C21.1 8.788,6.629
NetC22_2: C22.2 UB1.2 Y1.1 | length 12.2
  Bottom Layer w0.2: Y1.1 7.95,8.306 9.754,8.306 ; Y1.1@8.13,8.488 ccw(c8.57,8.928) 8.57,8.306 ; Y1.1@8.271,8.135 cw(c8.685,7.721) 8.685,8.306 ; Y1.1@8.271,8.629 ccw(c9.053,9.411) 9.053,8.306 ; C22.2@8.839,10.235 cw(c8.839,9.801) 9.145,10.108 ; C22.2 9.754,9.5 9.754,8.306 ; C22.2@8.993,10.389 ccw(c9.304,10.389) C22.2@9.084,10.169 ; UB1.2@11.033,4.964 ccw(c10.691,4.623) 10.691,5.105 ccw(c10.691,5.588) UB1.2@11.033,5.247 ; UB1.2 10.439,5.105 9.754,5.791 9.754,8.306
NetD1_1: D1.1 P2.2 | length 8.3
  Top Layer w1: D1.1@1.578,16.735 cw(c0.895,16.052) 1.861,16.052 cw(c2.826,16.052) D1.1@2.144,16.735 ; D1.1 1.861,13.608 2.575,12.893 P2.2
NetL1_2: L1.2 U2.32 | length 6.7
  Top Layer w0.2: U2.32 30.947,7.772 33.909,7.772 L1.2 ; 32.838,7.772 cw(c32.838,6.091) L1.2@34.027,7.28 ; 33.321,7.772 cw(c33.321,6.574) L1.2@34.168,7.421 ; 33.804,7.772 cw(c33.804,7.057) L1.2@34.31,7.563
NetL2_2: L2.2 U2.15 | length 6.5
  Top Layer w0.2: U2.15 28.235,13.808 L2.2 ; 28.903,14.476 ccw(c27.86,15.519) L2.2@29.335,15.519 ; 29.245,14.817 ccw(c28.543,15.519) L2.2@29.535,15.519 ; 29.394,14.967 cw(c29.743,14.617) L2.2@29.743,15.111
NetLED1_2: LED1.2 R10.1 | length 3
  Bottom Layer w0.4: LED1.2 R10.1 ; LED1.2@11.645,17.667 cw(c12.04,17.271) 12.04,17.831 cw(c12.04,18.39) LED1.2@11.645,17.995
NetLED2_2: LED2.2 R11.1 | length 3
  Bottom Layer w0.4: LED2.2 13.564,16.027 R11.1 ; LED2.2@11.67,15.863 cw(c12.066,15.468) 12.066,16.027 cw(c12.066,16.587) LED2.2@11.67,16.191
NetQ1_G: Q1.G Q2.G R12.2 R13.1 | length 17.7
  Top Layer w0.2: R12.2 10.627,10.16 11.643,11.176 R13.1 13.386,11.227 13.386,13.818 13.767,14.199 14.717,14.199 Q2.G ; R12.2@8.237,10.051 cw(c8.5,9.788) 8.5,10.16 cw(c8.5,10.532) R12.2@8.237,10.269 ; Q1.G@11.413,11.303 cw(c10.551,11.303) 11.161,10.693 cw(c11.77,10.083) Q1.G@11.77,10.946 ; Q1.G@11.882,11.414 ccw(c12.457,11.989) 12.457,11.176 ; Q1.G@12.023,11.05 cw(c12.326,10.747) 12.326,11.176 ; Q1.G@12.023,11.556 ccw(c12.939,12.472) 12.939,11.176 ; R13.1@13.302,11.067 ccw(c13.039,10.804) 13.039,11.176 ccw(c13.039,11.548) 13.302,11.285 ccw(c13.101,11.486) 13.386,11.486 ; 13.386,11.609 ccw(c13.844,11.609) R13.1@13.52,11.285 ; Q2.G@15.325,15.164 cw(c14.462,15.164) 15.072,14.554 cw(c15.682,13.944) Q2.G@15.682,14.807
NetQ3_B: Q3.B R14.1 R15.1 | length 6.9
  Top Layer w0.2: R14.1@17.526,14.527 cw(c17.526,14.094) 17.832,14.4 ; R14.1 18.567,13.665 R15.1 18.578,13.401 Q3.B ; R14.1@17.68,14.681 ccw(c17.99,14.681) R14.1@17.771,14.462 ; 18.143,14.09 cw(c17.49,13.437) R15.1@18.413,13.437 ; Q3.B@18.325,12.114 ccw(c17.715,12.724) 18.578,12.724 ccw(c19.44,12.724) Q3.B@18.83,12.114 ; R15.1@18.459,13.277 cw(c18.171,12.989) 18.578,12.989 ; 18.484,13.748 cw(c18.173,13.437) R15.1@18.613,13.437 ; 18.578,13.039 cw(c18.915,13.039) R15.1@18.676,13.277
NetQ3_C: Q3.C R13.2 | length 7.7
  Top Layer w0.2: R13.2 17.297,10.16 Q3.C ; R13.2@13.571,10.051 cw(c13.834,9.788) 13.834,10.16 cw(c13.834,10.532) R13.2@13.571,10.269 ; 16.192,10.16 cw(c16.192,8.487) Q3.C@17.375,9.67 ; 16.675,10.16 cw(c16.675,8.97) Q3.C@17.516,9.811 ; 17.158,10.16 cw(c17.158,9.453) Q3.C@17.658,9.953
NetQ4_1: Q4.1 R8.1 R9.1 | length 6.3
  Bottom Layer w0.2: Q4.1 35.819,16.378 R8.1 ; Q4.1@32.917,16.125 cw(c33.527,15.516) 33.527,16.378 cw(c33.527,17.24) Q4.1@32.917,16.631 ; 34.021,16.378 cw(c34.021,15.936) R9.1@34.334,16.249 ; 34.12,16.378 ccw(c34.12,16.68) R9.1@34.334,16.466 ; R9.1@34.602,16.249 cw(c34.914,15.936) 34.914,16.378 ; R9.1@34.602,16.466 ccw(c34.816,16.68) 34.816,16.378 ; 35.393,16.378 cw(c35.393,15.936) R8.1@35.705,16.249 ; 35.492,16.378 ccw(c35.492,16.68) R8.1@35.705,16.466
NetR16_1: R16.1 U1.8 | length 3.6
  Top Layer w0.6: R16.1 9.207,1.182 U1.8 ; R16.1@8.985,1.595 ccw(c9.982,2.591) 9.982,1.182
NetU2_2: U2.2 X1.1 | length 7.2
  Top Layer w0.2: U2.2 32.833,9.084 33.553,9.804 35.939,9.804 X1.1 ; 36.119,9.984 cw(c36.716,9.387) X1.1@36.716,10.232 ; 36.24,10.105 ccw(c35.813,10.532) X1.1@36.416,10.532
P04/LED_RED: J2.3 R10.2 U2.27 | length 39.5
  Top Layer w0.2: v1@28.053,4.332 ccw(c27.711,4.674) 28.194,4.674 ccw(c28.677,4.674) v1@28.335,4.332 ; v1(28.194,4.191) 28.194,5.08 28.635,5.521 28.635,5.845 28.635,6.437 28.635,7.502 28.635,7.634 U2.27
  Bottom Layer w0.2: R10.2 17.424,17.831 18.085,17.17 18.085,11.913 19.787,10.211 24.384,10.211 25.349,9.246 25.349,5.486 26.645,4.191 v1(28.194,4.191) 30.531,4.191 30.822,3.899 J2.3 ; R10.2@14.688,17.722 cw(c14.951,17.459) 14.951,17.831 cw(c14.951,18.203) R10.2@14.688,17.94 ; v1@28.053,4.05 ccw(c27.711,3.708) 27.711,4.191 ccw(c27.711,4.674) v1@28.053,4.332 ; v1@28.335,4.05 cw(c28.677,3.708) 28.677,4.191 cw(c28.677,4.674) v1@28.335,4.332 ; J2.3@30.469,2.155 ccw(c29.615,3.009) 30.822,3.009 ccw(c32.029,3.009) J2.3@31.176,2.155 ; J2.3@30.61,2.014 ccw(c30.098,2.526) 30.822,2.526 ccw(c31.547,2.526) J2.3@31.035,2.014
P05/LED_GREEN: J2.2 R11.2 U2.28 | length 39.4
  Top Layer w0.2: J2.2@28.469,2.155 ccw(c27.101,3.523) 29.035,3.523 ; J2.2@28.61,2.014 ccw(c27.584,3.04) 29.035,3.04 ; J2.2@28.752,1.873 ccw(c28.067,2.557) 29.035,2.557 ; J2.2@28.798,1.245 29.035,1.482 29.035,6.271 29.035,7.668 U2.28 ; 29.035,2.495 ccw(c29.515,2.495) J2.2@29.176,2.155
  Bottom Layer w0.2: R11.2 16.866,16.002 17.577,15.291 17.577,11.786 19.558,9.804 24.181,9.804 24.917,9.068 24.917,5.156 26.67,3.404 28.372,3.404 28.822,2.953 ; R11.2@14.714,15.893 cw(c14.977,15.63) 14.977,16.002 cw(c14.977,16.374) R11.2@14.714,16.111 ; J2.2@28.481,2.167 ccw(c27.747,2.953) 28.822,2.953 ; J2.2@28.618,2.021 ccw(c28.177,2.492) 28.822,2.492 ccw(c29.467,2.492) J2.2@29.027,2.021 ; J2.2 28.822,2.953 ; J2.2@29.164,2.167 cw(c29.897,2.953) 28.822,2.953
P06/MOTO1: J2.5 R3.2 U1.3 U2.29 | length 40.3
  Top Layer w0.2: U1.3 17.258,3.722 ; U1.3@16.867,3.522 cw(c16.867,2.095) 17.876,3.104 ; U1.3@16.867,3.722 cw(c16.867,2.778) 17.535,3.446 ; U1.3@16.867,3.922 cw(c16.867,3.461) 17.193,3.787 ; U1.3@17.03,3.605 cw(c17.258,3.44) 17.258,3.722 ; U1.3@17.03,3.839 ccw(c17.258,4.004) 17.258,3.722 ; 17.943,3.037 ccw(c18.415,3.508) v1@18.415,2.842 ; 18.127,2.853 cw(c17.916,2.642) v1@18.215,2.642 ; v1@18.339,2.642 17.258,3.722 ; v1(18.415,2.642) R3.2 ; v1@18.556,2.5 cw(c18.898,2.159) 18.898,2.642 cw(c18.898,3.124) v1@18.556,2.783 ; R3.2@19.398,2.533 ccw(c19.135,2.27) 19.135,2.642 ccw(c19.135,3.013) R3.2@19.398,2.75 ; U2.29 29.435,7.966 29.435,6.106 29.435,5.236 31.725,2.946 34.392,2.946 34.822,2.516 ; J2.5@34.652,2.272 ccw(c34.563,2.516) 34.822,2.516 ; J2.5 34.822,2.516 ; J2.5@34.993,2.272 cw(c35.082,2.516) 34.822,2.516
  Bottom Layer w0.2: v1@18.415,2.442 cw(c18.415,1.959) 18.756,2.3 cw(c19.098,2.642) v1@18.615,2.642 ; v1(18.415,2.642) 20.498,0.559 33.679,0.559 J2.5 ; 33.798,0.678 cw(c34.822,-0.347) J2.5@34.822,1.102 ; 34.04,0.919 ccw(c33.357,1.602) J2.5@34.322,1.602 ; 34.14,1.019 cw(c34.822,0.336) J2.5@34.822,1.302
P07/MOTO0: J2.4 R4.2 U1.2 U2.30 | length 34.4
  Top Layer w0.2: U1.2 17.335,2.452 ; U1.2@17.012,2.314 cw(c17.335,2.006) 17.335,2.452 ; U1.2@17.012,2.59 ccw(c17.335,2.898) 17.335,2.452 ; R4.2@19.398,1.237 ccw(c19.135,0.974) 19.135,1.346 ccw(c19.135,1.718) R4.2@19.398,1.455 ; R4.2@19.507,1.167 cw(c19.507,0.734) 19.813,1.04 ; R4.2@19.661,1.321 ccw(c19.972,1.321) R4.2@19.752,1.101 ; U2.30 29.835,6.842 32.741,3.937 v1(32.791,3.937) ; 31.798,0.678 cw(c32.822,-0.347) J2.4@32.822,1.102 ; 32.04,0.919 ccw(c31.357,1.602) J2.4@32.322,1.602 ; 32.14,1.019 cw(c32.822,0.336) J2.4@32.822,1.302 ; 32.363,4.314 ccw(c32.791,4.742) v1@32.791,4.137 ; 32.486,4.192 cw(c32.231,3.937) v1@32.591,3.937 ; J2.4 31.679,0.559 20.295,0.559 R4.2 18.44,1.346 17.335,2.452
  Bottom Layer w0.2: J2.4@32.469,2.155 ccw(c31.674,2.95) 32.798,2.95 ; J2.4@32.61,2.014 ccw(c32.157,2.467) 32.798,2.467 ; v1@32.65,3.796 cw(c32.293,3.438) 32.798,3.438 ; v1(32.791,3.937) 32.798,3.93 J2.4@32.798,1.702 ; 32.798,2.585 ccw(c33.606,2.585) J2.4@33.035,2.014 ; 32.798,3.068 ccw(c34.088,3.068) J2.4@33.176,2.155 ; 32.798,3.47 cw(c33.258,3.47) v1@32.933,3.796
PWR_CTL: R14.2 U2.11 | length 16.8
  Top Layer w0.2: R14.2 25.171,14.707 v1(26.467,13.411) ; R14.2@18.651,14.598 cw(c18.914,14.335) 18.914,14.707 cw(c18.914,15.078) R14.2@18.651,14.815 ; v1@26.267,13.411 ccw(c25.784,13.411) 26.125,13.753 ccw(c26.467,14.094) v1@26.467,13.611 ; v1@29.704,13.27 cw(c29.385,12.952) 29.835,12.952 ; U2.11 29.835,13.402 v1(29.845,13.411) ; 29.835,12.905 cw(c30.351,12.905) v1@29.986,13.27
  Bottom Layer w0.2: v1(26.467,13.411) v1(29.845,13.411) ; v1@26.608,13.27 cw(c26.95,12.928) 26.95,13.411 cw(c26.95,13.894) v1@26.608,13.553 ; v1@29.704,13.27 ccw(c29.362,12.928) 29.362,13.411 ccw(c29.362,13.894) v1@29.704,13.553
REMOTO: U2.10
RSTN: J2.6 U2.8 | length 19.2
  Top Layer w0.2: U2.8 31.88,11.484 v1(32.436,12.04) ; v1@32.236,12.04 cw(c31.753,12.04) 32.094,11.698 cw(c32.436,11.357) v1@32.436,11.84
  Bottom Layer w0.2: v1@32.294,11.898 cw(c31.953,11.557) 32.436,11.557 cw(c32.919,11.557) v1@32.577,11.898 ; v1(32.436,12.04) 32.436,11.379 34.163,9.652 34.163,4.724 36.798,2.089 J2.6@36.798,1.245 ; 35.783,3.105 cw(c34.48,1.802) J2.6@36.322,1.802 ; 36.124,2.763 cw(c35.163,1.802) J2.6@36.522,1.802 ; 36.418,2.469 ccw(c36.822,2.873) J2.6@36.822,2.302 ; 36.466,2.422 cw(c35.846,1.802) J2.6@36.722,1.802
RX1: pad.2 U2.24 | length 3.6
  Top Layer w0.2: pad.2 27.102,7.849 ; pad.2@26.575,7.597 cw(c27.102,7.17) 27.102,7.849 ; pad.2@26.575,8.1 ccw(c27.102,8.527) 27.102,7.849 ; 27.102,7.849 27.235,7.982 ; 27.235,7.982 U2.24 27.235,7.982
RX2/SETKEY: SET.1 U2.21 | length 15.7
  Top Layer w0.2: SET.1 27.178,3.785 27.381,3.988 v1(27.381,4.928) ; SET.1@24.108,3.502 cw(c24.791,2.819) 24.791,3.785 cw(c24.791,4.75) SET.1@24.108,4.067 ; v1@25.922,10.225 ccw(c26.747,11.049) 26.747,9.884 ; 26.264,9.884 cw(c26.264,10.567) v1(25.781,10.084) 25.981,9.884 U2.21
  Bottom Layer w0.2: v1@25.64,9.942 cw(c25.298,9.601) 25.781,9.601 cw(c26.264,9.601) v1@25.922,9.942 ; v1(25.781,10.084) 25.781,6.528 v1(27.381,4.928)
SCL: R5.2 U2.25 UB1.6 | length 17.6
  Top Layer w0.2: v1(24.308,6.325) 27.686,6.325 27.835,6.474 27.835,6.768 27.835,7.171 27.835,7.303 U2.25 ; v1@24.449,6.183 cw(c24.791,5.842) 24.791,6.325 cw(c24.791,6.807) v1@24.449,6.466
  Bottom Layer w0.2: UB1.6 R5.2 19.507,5.791 19.837,5.461 24.079,5.461 24.308,5.69 v1(24.308,6.325) ; UB1.6@17.415,6.234 cw(c17.757,5.893) 17.757,6.375 cw(c17.757,6.858) UB1.6@17.415,6.517 ; R5.2@19.398,6.241 cw(c19.135,5.978) 19.507,5.978 cw(c19.879,5.978) R5.2@19.616,6.241 ; R5.2@19.398,6.267 ccw(c19.135,6.004) 19.135,6.375 ccw(c19.135,6.747) R5.2@19.398,6.484 ; v1@24.166,6.183 cw(c23.825,5.842) 24.308,5.842 cw(c24.791,5.842) v1@24.449,6.183
SDA: R6.2 U2.26 UB1.5 | length 17.5
  Top Layer w0.2: v1(23.317,6.147) 23.739,5.725 27.95,5.725 28.235,6.01 28.235,6.603 28.235,7.337 U2.26
  Bottom Layer w0.2: UB1.5 R6.2 20.087,8.225 21.62,8.225 23.317,6.528 ; UB1.5@17.415,7.504 cw(c17.757,7.163) 17.757,7.645 cw(c17.757,8.128) UB1.5@17.415,7.787 ; R6.2@19.398,7.537 ccw(c19.135,7.274) 19.135,7.645 ccw(c19.135,8.017) R6.2@19.398,7.754 ; R6.2@19.507,7.825 ccw(c19.507,8.258) 19.813,7.952 ; R6.2@19.661,7.671 cw(c19.972,7.671) R6.2@19.752,7.89 ; v1@23.204,6.311 ccw(c23.054,6.528) 23.317,6.528 ; v1(23.317,6.147) 23.317,6.528 ; v1@23.431,6.311 cw(c23.58,6.528) 23.317,6.528
TX1: pad.1 U2.23 | length 7.5
  Top Layer w0.2: pad.1@25.081,8.803 cw(c25.759,8.124) 25.759,9.084 ; pad.1@25.364,8.52 cw(c26.725,7.159) 26.725,9.084 ; pad.1@25.376,9.031 ccw(c25.471,9.258) 25.645,9.084 ; pad.1@25.591,8.815 cw(c25.819,8.91) 25.645,9.084 ; 25.873,9.084 U2.23 25.645,9.084 ; 26.242,9.084 ccw(c26.242,7.642) pad.1 25.645,9.084
TX2: U2.20
V6V: C8.1 C9.1 Q1.D R7.2 U1.4 | length 46.4
  Top Layer w0.4: Q1.D@10.82,8.921 cw(c10.82,8.076) 11.418,8.674 ; Q1.D 11.481,8.611 18.644,8.611 20.041,10.008 v1(20.041,13.437) ; Q1.D@11.078,9.178 ccw(c11.475,9.178) Q1.D@11.194,8.898
  Top Layer w0.6: Q1.D 10.82,7.518 11.481,6.858 18.72,6.858 19.482,6.096 C9.1 C8.1 ; U1.4 19.47,4.992 ; 17.295,4.992 ccw(c17.295,7.876) C9.1@19.335,5.837 ; 18.744,4.992 ccw(c18.744,6.427) C9.1@19.759,5.412
  Bottom Layer w0.4: v1(20.041,13.437) 20.041,17.551 21.006,18.517 27,18.517 R7.2
VBAT: C23.1 C24.1 D1.2 Q1.S R1.1 R12.1 U3.3 | length 47.3
  Top Layer w0.4: v1(34.214,17.78) 34.239,17.755 R1.1 ; v1@34.285,17.851 ccw(c34.517,18.083) 34.517,17.755
  Top Layer w1: D1.2 v1(7.518,17.018) C23.1@8.814,17.018 ; D1.2@6.244,16.735 cw(c6.926,16.052) 6.926,17.018 cw(c6.926,17.984) D1.2@6.244,17.301 ; R12.1 Q1.S@9.743,11.176 ; 8.814,11.227 C23.1@8.814,17.018 ; 8.814,13.467 cw(c10.215,13.467) U3.3@9.224,14.457 ; 8.814,15.388 ccw(c10.215,15.388) U3.3@9.224,14.397 ; C23.1 C23.1@8.814,17.018 ; C24.1@10.703,17.018 C23.1@8.814,17.018
  Bottom Layer w0.4: v1(7.518,17.018) 7.518,18.72 8.204,19.406 33.68,19.406 34.214,18.872 v1(34.214,17.78)
VDD: C1.2 C10.2 C12.2 C13.2 C19.2 L2.1 U2.1 U2.22 U2.31 | length 47.4
  Top Layer w0.2: C13.2 24.436,9.484 U2.22 ; C13.2@24.028,9.256 ccw(c24.028,9.689) 24.335,9.383 ; C13.2@24.182,9.102 cw(c24.493,9.102) C13.2@24.273,9.321 ; U2.31 30.235,7.306 v1(31.039,6.502) ; v1@30.839,6.502 ccw(c30.356,6.502) 30.697,6.844 ccw(c31.039,7.185) v1@31.039,6.702 ; U2.1 33.423,8.684 v1(33.452,8.712) ; 32.9,8.684 ccw(c32.9,9.264) v1@33.31,8.854 ; 33.038,8.684 cw(c33.038,8.298) v1@33.31,8.571
  Top Layer w0.3: C13.2 C12.2 24.028,7.569 24.74,6.858 27.051,6.858 v1(27.229,7.036) ; C12.2@24.132,7.874 ccw(c25.119,7.874) 24.421,7.176 ; 26.437,6.858 ccw(c26.437,7.827) v1@27.123,7.142 ; C19.2@28.042,17.196 L2.1 31.14,17.196 31.648,16.688 v1(31.648,12.852) ; L2.1@30.403,16.943 cw(c31.014,16.332) 31.014,17.196 cw(c31.014,18.06) L2.1@30.403,17.449 ; v1@31.039,6.352 cw(c31.039,5.99) 31.295,6.246 cw(c31.551,6.502) v1@31.189,6.502 ; v1(31.039,6.502) 32.664,4.877 C1.2 ; v1@31.542,12.958 ccw(c31.286,13.215) 31.648,13.215 ccw(c32.011,13.215) v1@31.754,12.958 ; v1(33.452,8.712) 34.544,8.712 C10.2 ; v1@33.558,8.606 cw(c33.814,8.35) 33.814,8.712 cw(c33.814,9.074) v1@33.558,8.818 ; C10.2@34.679,8.847 cw(c34.9,8.626) C10.2@34.9,8.938
  Bottom Layer w0.3: v1(27.229,7.036) 27.991,7.798 30.886,7.798 ; v1@27.229,7.186 ccw(c27.229,7.548) 27.485,7.292 ccw(c27.741,7.036) v1@27.379,7.036 ; v1@30.933,6.608 ccw(c30.677,6.865) 31.039,6.865 ccw(c31.401,6.865) v1@31.145,6.608 ; v1(31.039,6.502) 31.039,7.645 30.886,7.798 ; v1@31.542,12.746 cw(c31.286,12.49) 31.648,12.49 cw(c32.011,12.49) v1@31.754,12.746 ; v1(31.648,12.852) 31.648,8.56 ; 33.021,8.684 ccw(c33.021,9.143) v1@33.346,8.818 ; v1(33.452,8.712) 33.423,8.684 31.772,8.684 31.648,8.56 ; 30.886,7.798 31.648,8.56
VDD3V3: LED1.1 LED2.1 Q2.D | length 14.7
  Top Layer w0.4: Q2.D@14.55,12.857 cw(c14.111,12.418) 14.732,12.418 cw(c15.353,12.418) Q2.D@14.914,12.857 ; v1(14.732,11.963) Q2.D
  Bottom Layer w0.4: LED1.1@9.793,17.667 cw(c9.397,17.271) 9.957,17.271 cw(c10.516,17.271) LED1.1@10.121,17.667 ; LED2.1@9.818,15.863 cw(c9.484,15.529) 9.957,15.529 ; LED2.1@9.818,16.191 ccw(c9.484,16.526) 9.957,16.526 ; 9.957,15.406 cw(c10.603,15.406) LED2.1@10.146,15.863 ; 9.957,16.648 ccw(c10.603,16.648) LED2.1@10.146,16.191 ; LED1.1 9.957,14.605 10.363,14.199 13.919,14.199 14.732,13.386 v1(14.732,11.963)
pads on no net: U1. U1.1 U2.9 U2.12 U2.13 UB1. UB1.3 UB1.7

## Polygon pours and split planes (outlines as drawn)
GND on Bottom Layer "Top Layer-No Net" (solid, remove dead copper, pour order 4): 0,20 0,0 45,0 45,20
GND on Top Layer "Top Layer-No Net" (solid, remove dead copper, pour order 3): 0,20 0,0 45,0 45,20

## Keep-outs
Keep-Out Layer:
  pour cut-out: 40.132,20 45,20 45,0 40.107,0
  lines w0.127: 0,20 0,0 45,0 45,20
  lines w0.15: 0,20 45,20

## Other copper
Top Layer:
  pour cut-out: 30.632,8.306 39.929,8.306 40.056,8.179 40.056,6.579 39.929,6.452 31.623,6.452 30.582,7.493
  region net NetL1_2: 30.558,8.084 34.436,8.084 34.62,7.899 34.62,7.417 30.861,7.417 30.556,7.722
  region net M3V3: 27.457,14.097 27.457,12.116 27.737,11.836 27.889,11.836 27.889,13.919 27.788,14.021

## Silkscreen, mask and mechanical layers (free items; w line width, h text height)
Top Overlay:
  text "+" at 6.985,13.614 h1.5 r90
  text "6V" at 6.756,11.659 h1.5 r90
  text "-" at 6.934,10.008 h1.5 r90
  text "TX1" at 25.476,6.731 h0.8 r90
  text "RX1" at 26.543,5.893 h0.8 r90
  text "-" at 7.137,4.47 h1.5 r90
  text "M" at 6.883,3.124 h1.5 r90
  text "3.3V" at 25.629,2.794 h0.8
  text "+" at 7.137,1.702 h1.5 r90
  text "复位" at 22.835,0.406 h1.2
Bottom Overlay:
  lines w0.127: 17.297,19.228 18.313,19.228 ; 17.805,18.72 17.805,19.482 17.805,19.736
  text "JYD-LOCK-V1.2.0.2020.12.23" at 37.617,3.023 h0.8 r270
Top Solder:
  pour cut-out: 40.107,17.374 45,17.374 45,5.334 40.107,5.334